# EAGLE board day0_Muhammad Salman Galileo_13215003 (EAGLE 7.6.0)
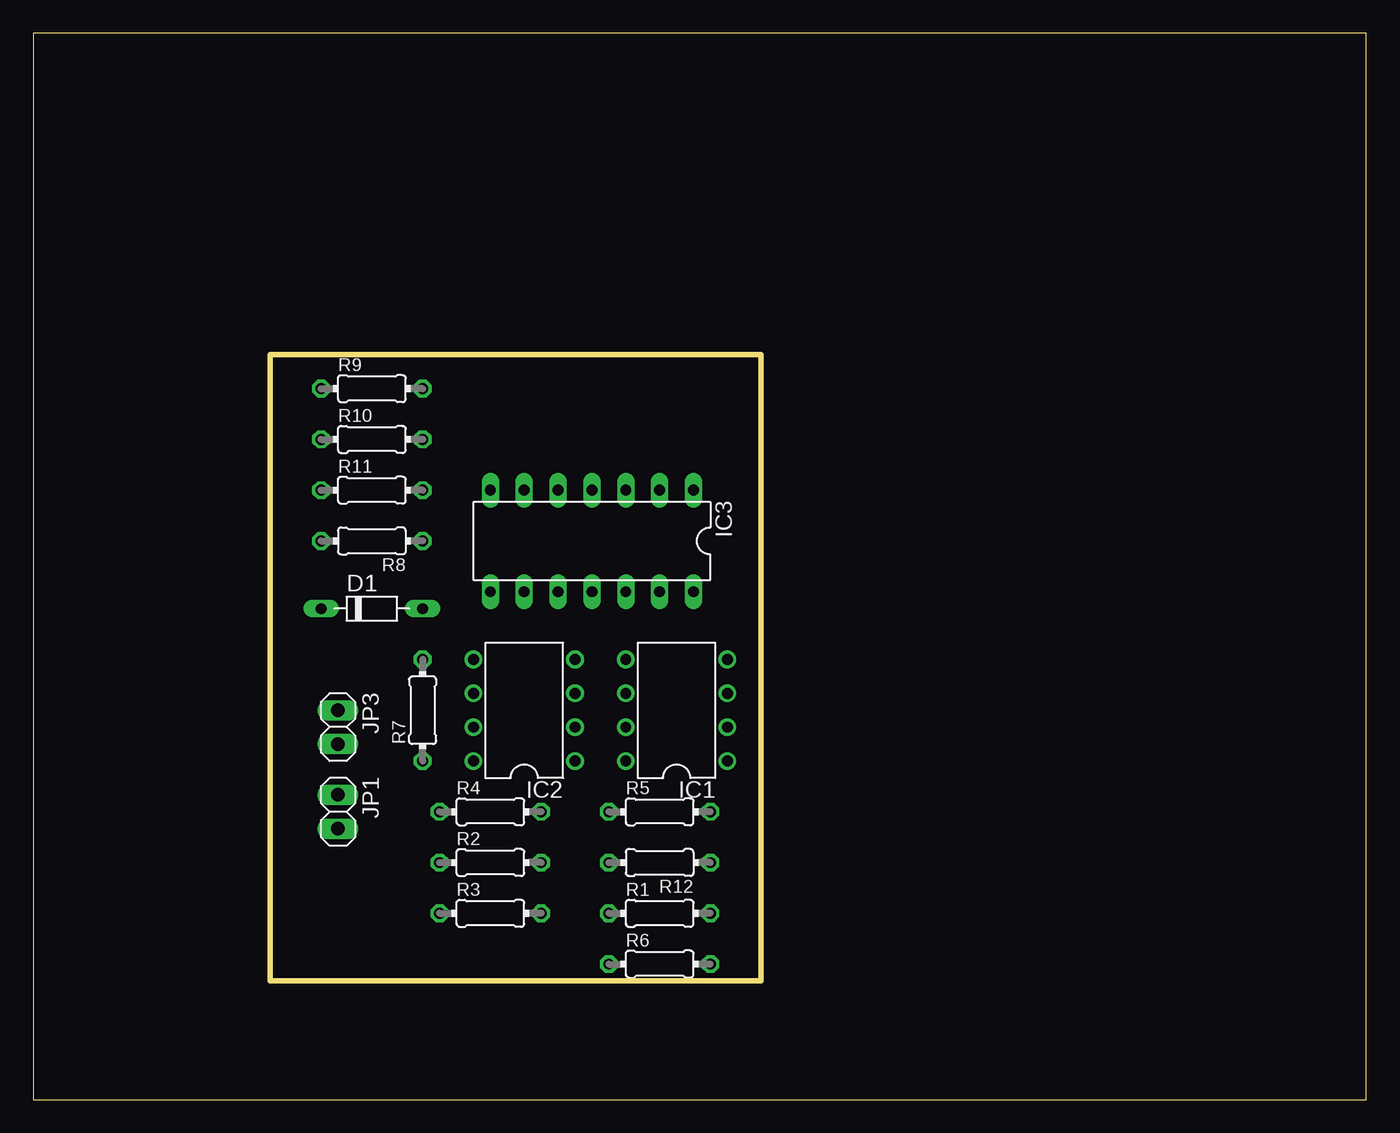
[diagram p0: board, top side]
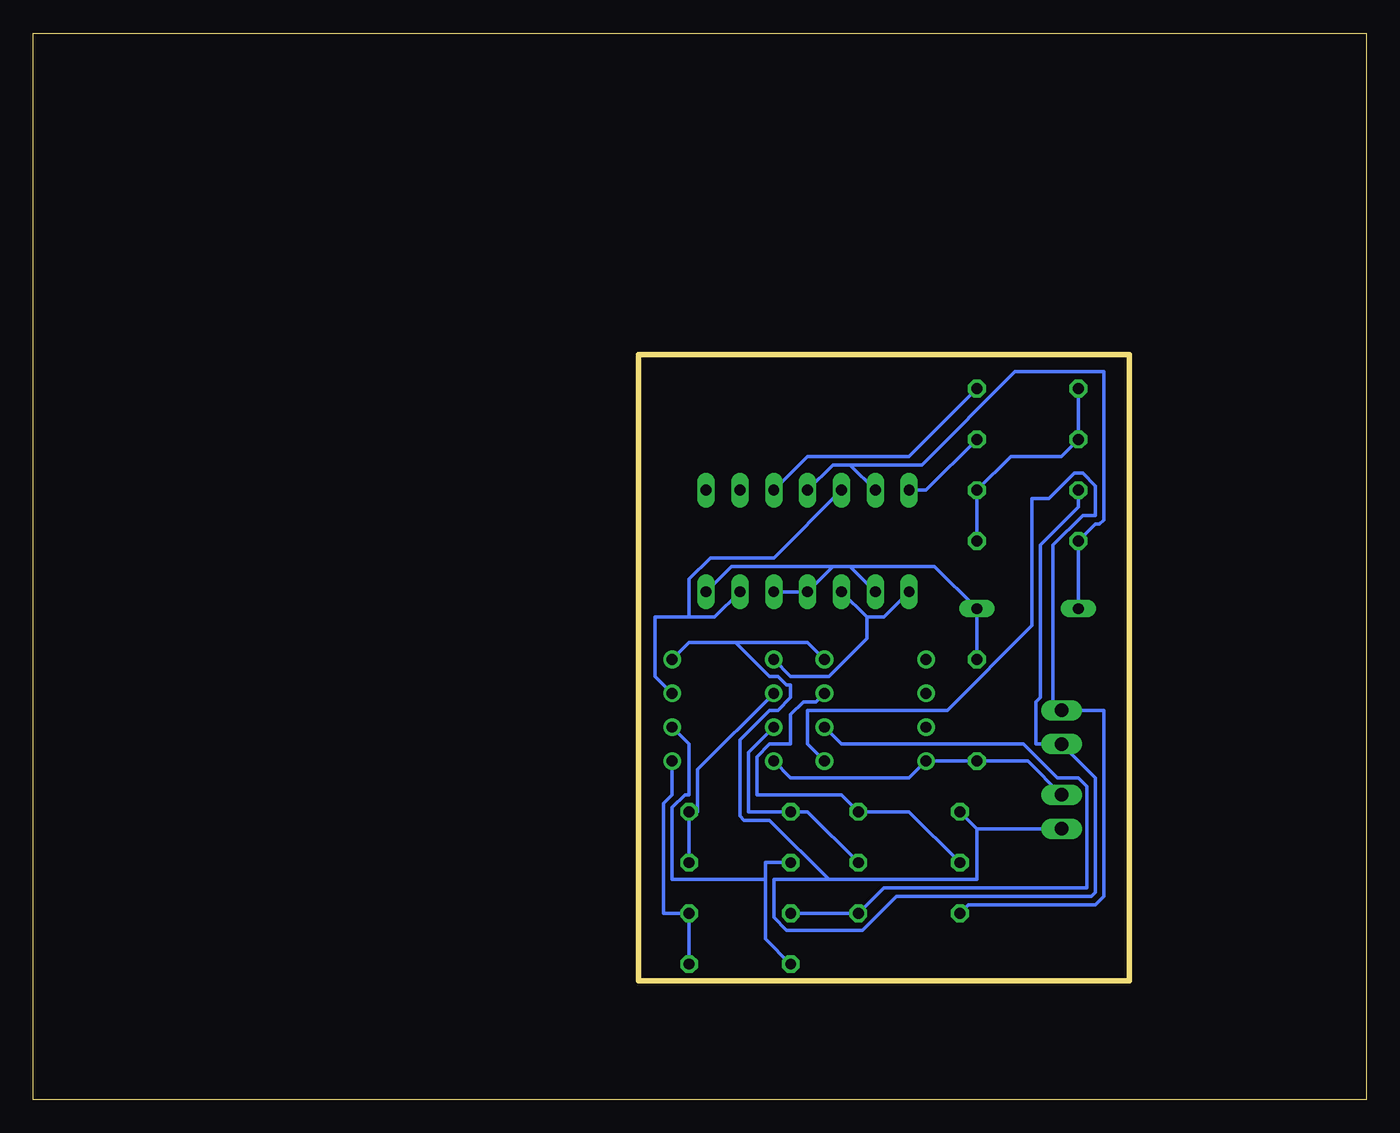
[diagram p1: board, bottom side, seen from below]

Size 100 x 80 mm. Coordinates in mm from the lower left corner, seen from the top.
Outline: 0,0 100,0 100,80 0,80 0,0
Outline: 54.61,8.89 54.61,55.88 17.78,55.88 17.78,8.89 54.61,8.89
Copper layers (1*16): Top 0.035mm / dielectric 1.5mm / Bottom 0.035mm
Design rules "default": minimum track width 10mil, minimum drill 24mil, track to track 8mil, track to pad 8mil, pad to pad 8mil, via to via 8mil, smd to smd 8mil, copper to edge 40mil, drill to drill 8mil, minimum pad ring 10mil, minimum via ring 8mil, stop-mask expansion 4mil, vias tented up to drill 0mil, thermal gap 10mil

## Footprints (pad centres in the part's own frame; a part is rotated, then mirrored left to right if it is on the bottom)
D-7.5 = drill 0.813 long: A 3.81,0; C -3.81,0
DIL08 = drill 0.813 pad 1.27: 1 -3.81,-3.81; 2 -1.27,-3.81; 3 1.27,-3.81; 4 3.81,-3.81; 5 3.81,3.81; 6 1.27,3.81; 7 -1.27,3.81; 8 -3.81,3.81
DIL14 = drill 0.813 long: 1 -7.62,-3.81; 2 -5.08,-3.81; 3 -2.54,-3.81; 4 0,-3.81; 5 2.54,-3.81; 6 5.08,-3.81; 7 7.62,-3.81; 8 7.62,3.81; 9 5.08,3.81; 10 2.54,3.81; 11 0,3.81; 12 -2.54,3.81; 13 -5.08,3.81; 14 -7.62,3.81
1X02 = drill 1.016 long: 1 -1.27,0; 2 1.27,0
0204/7 = drill 0.813 octagon: 1 -3.81,0; 2 3.81,0

## Placement (x,y rotation side)
D1  1N4004  [D-7.5]  25.4,36.83 0 top
IC1  LM358N  [DIL08]  48.26,29.21 90 top
IC2  LM358N  [DIL08]  36.83,29.21 90 top
IC3  CA3046  [DIL14]  41.91,41.91 180 top
JP1  IN  [1X02]  22.86,21.59 270 top
JP3  OUT  [1X02]  22.86,27.94 270 top
R1  100K  [0204/7]  46.99,13.97 0 top
R2  100K  [0204/7]  34.29,17.78 0 top
R3  100K  [0204/7]  34.29,13.97 0 top
R4  100K  [0204/7]  34.29,21.59 0 top
R5  100K  [0204/7]  46.99,21.59 0 top
R6  100K  [0204/7]  46.99,10.16 0 top
R7  60K  [0204/7]  29.21,29.21 90 top
R8  12K  [0204/7]  25.4,41.91 180 top
R9  100K  [0204/7]  25.4,53.34 0 top
R10  200K  [0204/7]  25.4,49.53 0 top
R11  60K  [0204/7]  25.4,45.72 0 top
R12  1K  [0204/7]  46.99,17.78 180 top

## Library data of the parts
D1 = diode
IC1 IC2 = linear
IC3 = ic-package
JP1 JP3 = pinhead
R1-R12 = resistor

## Nets
GND: IC1.4 IC2.4 JP1.2 JP3.2 R4.1 R11.1
N$1: D1.A IC3.9 IC3.11 IC3.12 IC3.14 R7.2
N$2: D1.C IC3.4 IC3.6 R8.2
N$3: IC3.3 R9.2
N$4: IC3.7 R10.2
N$5: R8.1 R9.1 R10.1 R11.2
N$6: IC1.3 IC3.5 IC3.13
N$7: IC1.5 IC3.8 IC3.10
N$9: IC1.7 R2.2 R5.1
N$10: IC2.2 R1.1 R3.2
N$11: IC1.2 R6.1 R12.2
N$12: IC1.6 R5.2 R12.1
N$13: IC1.1 R1.2 R6.2
N$14: IC2.3 R2.1 R4.2
VCC: IC1.8 IC2.8 JP1.1 R7.1
VOUT: IC2.1 JP3.1 R3.1

## Tracks (layer width: path | path; a pad name or v marks a point on that pad's centre or on a via)
GND
  Bottom 0.254: R11.1 21.59,44.45 24.45,41.59 24.45,30.16 24.77,29.84 24.77,26.67 JP3.2 20.32,24.13 20.32,15.56 20.64,15.24 35.24,15.24 37.78,12.7 43.5,12.7 44.45,13.65 44.45,16.51 40.32,16.51 | 29.21,20.32 R4.1 | JP1.2 29.21,20.32 | IC2.4 41.91,34.29 47.31,34.29 | 47.31,34.29 50.8,34.29 IC1.4 | 29.21,20.32 29.21,16.51 40.32,16.51 | 40.32,16.51 44.77,20.95 46.67,20.95 46.99,21.27 46.99,26.99 44.77,29.21 44.13,29.21 43.18,30.16 43.18,31.11 43.5,31.11 44.13,31.75 44.77,31.75 47.31,34.29
N$1
  Bottom 0.254: R7.2 D1.A 32.38,40.01 38.73,40.01 | 38.73,40.01 IC3.9 | 40.01,40.01 38.73,40.01 | 40.01,40.01 IC3.11 IC3.12 | IC3.14 47.62,40.01 40.01,40.01
N$2
  Bottom 0.254: D1.C R8.2 20.32,43.18 20,43.18 19.68,43.5 19.68,54.61 26.35,54.61 33.34,47.62 38.73,47.62 | 38.73,47.62 IC3.6 | 38.73,47.62 40.01,47.62 IC3.4
N$3
  Bottom 0.254: R9.2 34.29,48.26 41.91,48.26 IC3.3
N$4
  Bottom 0.254: R10.2 33.02,45.72 IC3.7
N$5
  Bottom 0.254: R9.1 R10.1 22.86,48.26 26.67,48.26 R11.2 R8.1
N$6
  Bottom 0.254: IC1.3 53.34,31.75 53.34,36.2 50.8,36.2 | 50.8,36.2 48.9,36.2 IC3.13 | IC3.5 44.45,40.64 49.21,40.64 50.8,39.05 50.8,36.2
N$7
  Bottom 0.254: IC3.8 36.2,36.2 37.47,36.2 | IC3.10 37.47,36.2 | IC1.5 43.18,31.75 40.32,31.75 37.47,34.61 37.47,36.2
N$9
  Bottom 0.254: R2.2 41.91,21.59 R5.1 46.35,21.59 46.35,26.04 IC1.7
N$10
  Bottom 0.254: R1.1 R3.2 36.2,15.88 20.95,15.88 20.95,23.5 21.59,24.13 23.18,24.13 25.72,26.67 39.37,26.67 IC2.2
N$11
  Bottom 0.254: R6.1 45.09,12.06 45.09,16.51 | 45.09,16.51 45.09,17.78 R12.2 | IC1.2 50.8,26.67 50.8,22.86 51.12,22.86 52.07,21.91 52.07,16.51 45.09,16.51
N$12
  Bottom 0.254: R12.1 R5.2 50.16,21.59 50.16,24.77 IC1.6
N$13
  Bottom 0.254: R6.2 R1.2 52.7,13.97 52.7,22.23 52.07,22.86 IC1.1
N$14
  Bottom 0.254: R2.1 34.29,21.59 R4.2 39.37,22.86 45.72,22.86 45.72,25.72 44.77,26.67 43.18,26.67 43.18,28.89 42.23,29.84 41.27,29.84 IC2.3
VCC
  Bottom 0.254: IC1.8 43.18,24.13 34.29,24.13 IC2.8 R7.1 25.4,25.4 JP1.1
VOUT
  Bottom 0.254: R3.1 29.84,14.61 20.32,14.61 19.68,15.24 19.68,29.21 JP3.1 23.5,29.21 23.5,41.59 21.27,43.81 20.32,43.81 20.32,46.04 21.27,46.99 21.91,46.99 23.81,45.09 25.08,45.09 25.08,35.56 31.43,29.21 41.91,29.21 41.91,26.67 IC2.1